# EAGLE board axiom_beta_plugin_module_eMMC_v0.1-Beta.9bbf1b58 (EAGLE 7.7.0)
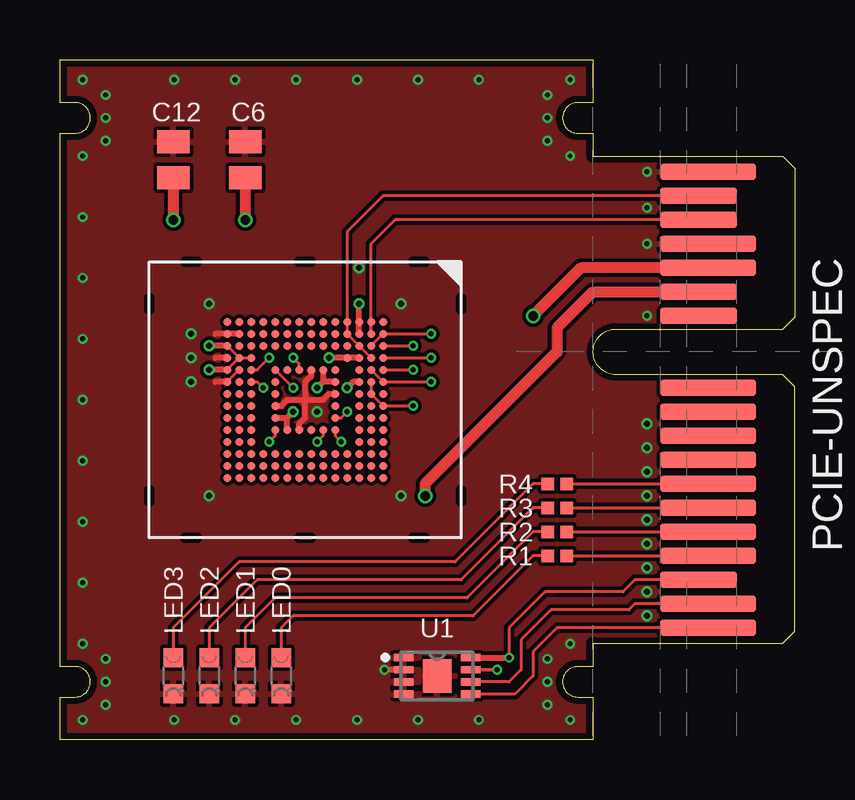
[diagram p0: board, top side]
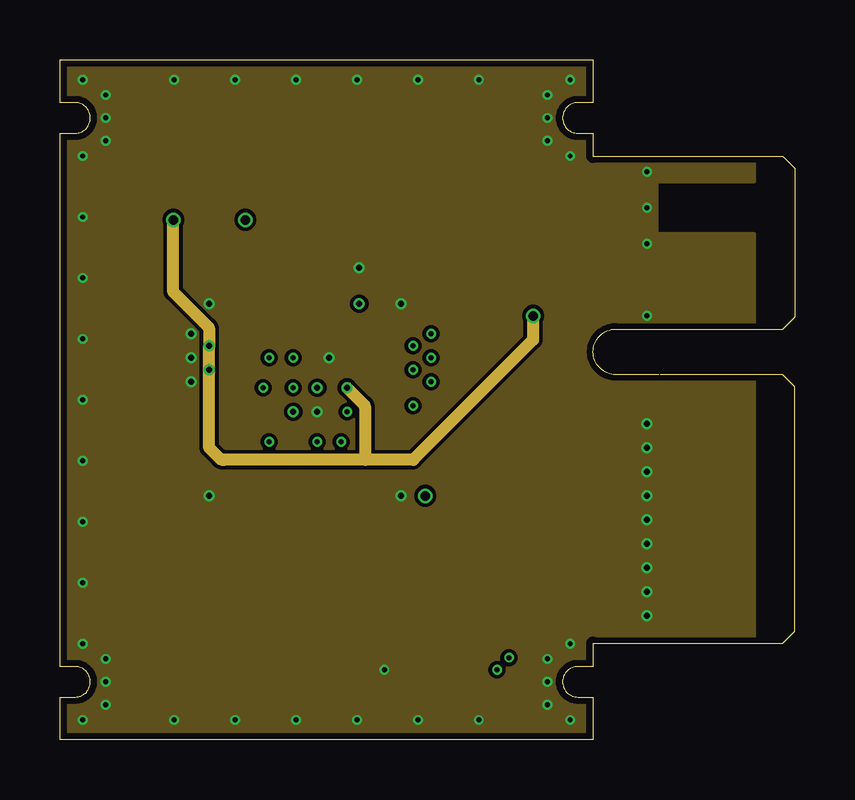
[diagram p1: board, inner layer Route2]
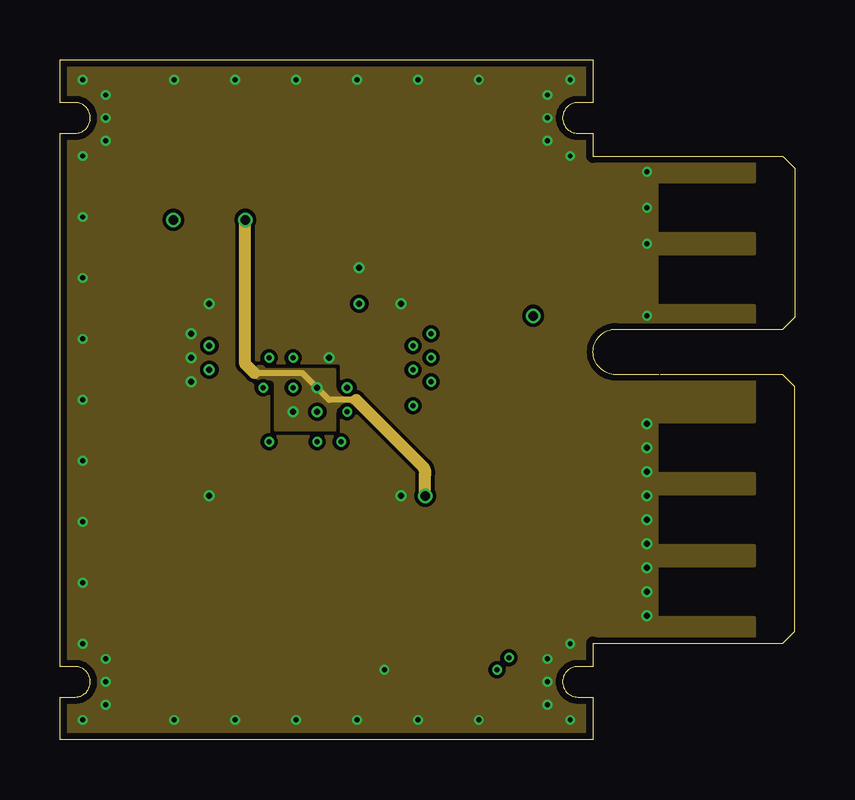
[diagram p2: board, inner layer Route15]
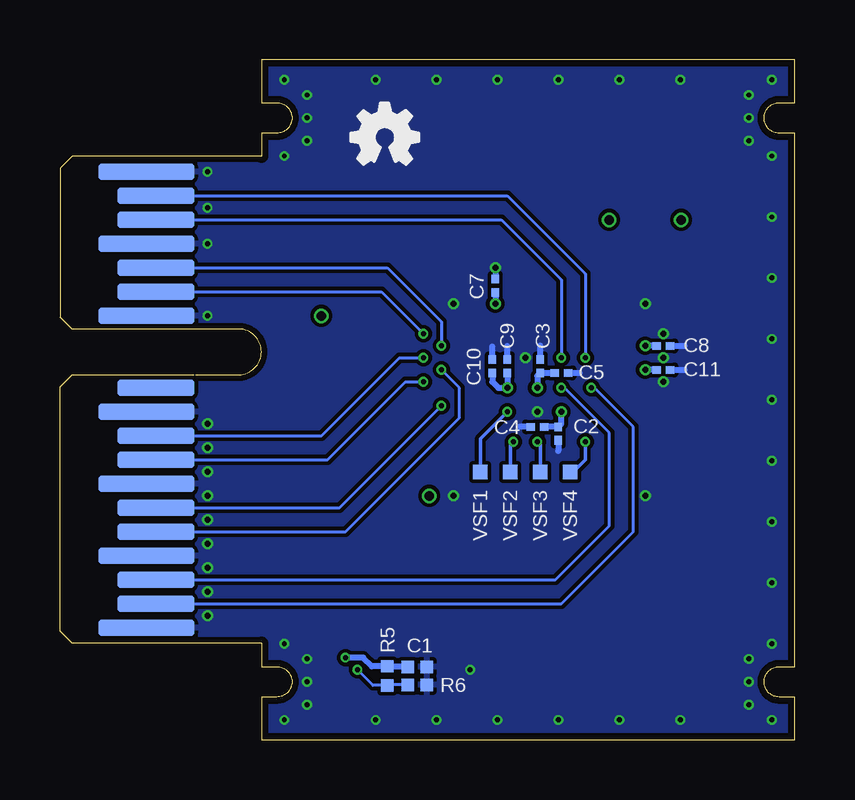
[diagram p3: board, bottom side, seen from below]

Size 30.62 x 28.32 mm. Coordinates in mm from the lower left corner, seen from the top.
Outline: 22.23,24.31 22.23,25.27 21.59,25.27 arc-90 20.96,25.91 arc-90 21.59,26.54 22.23,26.54 22.23,28.32 0,28.32 0,26.54 0.64,26.54 arc-90 1.27,25.91 arc-90 0.64,25.27 0,25.27 0,3.05 0.64,3.05 arc-90 1.27,2.41 arc-90 0.64,1.78 0,1.78 0,0 22.23,0 22.23,1.78 21.59,1.78 arc-90 20.96,2.41 arc-90 21.59,3.05 22.23,3.05 22.23,4.01
Copper layers (1*2*15*16): Top 0.035559375mm / dielectric 0.17018125mm / Route2 0.01778125mm / dielectric 47mil / Route15 0.01778125mm / dielectric 0.17018125mm / Bottom 0.035559375mm
Design rules "OSHPark-4layer-tuned *": minimum track width 5mil, minimum drill 8mil, track to track 6mil, track to pad 5mil, pad to pad 5mil, via to via 5mil, smd to smd 5mil, copper to edge 10mil, drill to drill 6mil, minimum pad ring 4mil, minimum via ring 4mil, stop-mask expansion 2mil, vias tented up to drill 20mil, thermal gap 6mil
Net classes: 0 default: width 0.127 mm, drill 0.203 mm; 1 power: width 0.254 mm, drill 0.203 mm
tKeepout: area -1,24.3 to 2.2,27.5; area -1,0.8 to 2.2,4; area 20,0.8 to 23.2,4; area 20,24.3 to 23.2,27.5
bKeepout: area -1,24.3 to 2.2,27.5; area -1,0.8 to 2.2,4; area 20,0.8 to 23.2,4; area 20,24.3 to 23.2,27.5
bRestrict: area 10.7,12.9 to 11.2,13.2; area 9.7,12.3 to 10,12.8; area 10.4,15.6 to 10.8,16.1; area 9.2,15.1 to 9.7,15.5; area 11.8,15.6 to 12.2,16.1; area 12.4,15.6 to 12.8,16.1; area 5,16.2 to 5.5,16.6; area 5,15.2 to 5.5,15.6; area 12.3,18.9 to 12.7,19.4

## Footprints (pad centres in the part's own frame; a part is rotated, then mirrored left to right if it is on the bottom)
0402-C = smd 0.52 x 0.52: 1 -0.4,0; 2 0.4,0
0201-C = smd 0.36 x 0.32: 1 -0.28,0; 2 0.28,0
0805-C = smd 0.95 x 1.35: 1 -0.75,0; 2 0.75,0
CHIPLED_0603 = smd 0.8 x 0.8: A 0,-0.75; C 0,0.75
PCIE-36-AXIOM = smd 0.7 x 4 bottom: A1 -11.5,3.6; A4 -8.5,3.6; A7 -5.5,3.6; A10 -2.5,3.6; A12 1.5,3.6; A15 4.5,3.6; A18 7.5,3.6 | smd 0.7 x 3.2 bottom: A2 -10.5,4; A3 -9.5,4; A5 -7.5,4; A6 -6.5,4; A8 -4.5,4; A9 -3.5,4; A11 -1.5,4; A13 2.5,4; A14 3.5,4; A16 5.5,4; A17 6.5,4 | smd 0.7 x 4: B1 -11.5,3.6; B2 -10.5,3.6; B4 -8.5,3.6; B5 -7.5,3.6; B6 -6.5,3.6; B7 -5.5,3.6; B8 -4.5,3.6; B9 -3.5,3.6; B10 -2.5,3.6; B11 -1.5,3.6; B14 3.5,3.6; B15 4.5,3.6; B18 7.5,3.6 | smd 0.7 x 3.2: B3 -9.5,4; B12 1.5,4; B13 2.5,4; B16 5.5,4; B17 6.5,4
DFN200X300X100-9N = smd 0.813 x 0.305: 1 -1.397,0.762; 2 -1.397,0.254; 3 -1.397,-0.254; 4 -1.397,-0.762; 5 1.397,-0.762; 6 1.397,-0.254; 7 1.397,0.254; 8 1.397,0.762 | smd 1.194 x 1.397: EP 0,0
FBGA153-SMD = smd 0.325 x 0.325: A1 -3.25,3.25; A2 -2.75,3.25; A3 -2.25,3.25; A4 -1.75,3.25; A5 -1.25,3.25; A6 -0.75,3.25; A7 -0.25,3.25; A8 0.25,3.25; A9 0.75,3.25; A10 1.25,3.25; A11 1.75,3.25; A12 2.25,3.25; A13 2.75,3.25; A14 3.25,3.25; B1 -3.25,2.75; B2 -2.75,2.75; B3 -2.25,2.75; B4 -1.75,2.75; B5 -1.25,2.75; B6 -0.75,2.75; B7 -0.25,2.75; B8 0.25,2.75; B9 0.75,2.75; B10 1.25,2.75; B11 1.75,2.75; B12 2.25,2.75; B13 2.75,2.75; B14 3.25,2.75; C1 -3.25,2.25; C2 -2.75,2.25; C3 -2.25,2.25; C4 -1.75,2.25; C5 -1.25,2.25; C6 -0.75,2.25; C7 -0.25,2.25; C8 0.25,2.25; C9 0.75,2.25; C10 1.25,2.25; C11 1.75,2.25; C12 2.25,2.25; C13 2.75,2.25; C14 3.25,2.25; D1 -3.25,1.75; D2 -2.75,1.75; D3 -2.25,1.75; D4 -1.75,1.75; D12 2.25,1.75; D13 2.75,1.75; D14 3.25,1.75; E1 -3.25,1.25; E2 -2.75,1.25; E3 -2.25,1.25; E5 -1.25,1.25; E6 -0.75,1.25; E7 -0.25,1.25; E8 0.25,1.25; E9 0.75,1.25; E10 1.25,1.25; E12 2.25,1.25; E13 2.75,1.25; E14 3.25,1.25; F1 -3.25,0.75; F2 -2.75,0.75; F3 -2.25,0.75; F5 -1.25,0.75; F10 1.25,0.75; F12 2.25,0.75; F13 2.75,0.75; F14 3.25,0.75; G1 -3.25,0.25; G2 -2.75,0.25; G3 -2.25,0.25; G5 -1.25,0.25; G10 1.25,0.25; G12 2.25,0.25; G13 2.75,0.25; G14 3.25,0.25; H1 -3.25,-0.25; H2 -2.75,-0.25; H3 -2.25,-0.25; H5 -1.25,-0.25; H10 1.25,-0.25; H12 2.25,-0.25; H13 2.75,-0.25; H14 3.25,-0.25; J1 -3.25,-0.75; J2 -2.75,-0.75; J3 -2.25,-0.75; J5 -1.25,-0.75; J10 1.25,-0.75; J12 2.25,-0.75; J13 2.75,-0.75; J14 3.25,-0.75; K1 -3.25,-1.25; K2 -2.75,-1.25; K3 -2.25,-1.25; K5 -1.25,-1.25; K6 -0.75,-1.25; K7 -0.25,-1.25; K8 0.25,-1.25; K9 0.75,-1.25; K10 1.25,-1.25; K12 2.25,-1.25; K13 2.75,-1.25; K14 3.25,-1.25; L1 -3.25,-1.75; L2 -2.75,-1.75; L3 -2.25,-1.75; L12 2.25,-1.75; L13 2.75,-1.75; L14 3.25,-1.75; M1 -3.25,-2.25; M2 -2.75,-2.25; M3 -2.25,-2.25; M4 -1.75,-2.25; M5 -1.25,-2.25; M6 -0.75,-2.25; M7 -0.25,-2.25; M8 0.25,-2.25; M9 0.75,-2.25; M10 1.25,-2.25; M11 1.75,-2.25; M12 2.25,-2.25; M13 2.75,-2.25; M14 3.25,-2.25; N1 -3.25,-2.75; N2 -2.75,-2.75; N3 -2.25,-2.75; N4 -1.75,-2.75; N5 -1.25,-2.75; N6 -0.75,-2.75; N7 -0.25,-2.75; N8 0.25,-2.75; N9 0.75,-2.75; N10 1.25,-2.75; N11 1.75,-2.75; N12 2.25,-2.75; N13 2.75,-2.75; N14 3.25,-2.75; P1 -3.25,-3.25; P2 -2.75,-3.25; P3 -2.25,-3.25; P4 -1.75,-3.25; P5 -1.25,-3.25; P6 -0.75,-3.25; P7 -0.25,-3.25; P8 0.25,-3.25; P9 0.75,-3.25; P10 1.25,-3.25; P11 1.75,-3.25; P12 2.25,-3.25; P13 2.75,-3.25; P14 3.25,-3.25
TP06SQ = smd 0.6 x 0.6: TP 0,0

## Placement (x,y rotation side)
C1  100n  [0402-C]  15.73,3.04 0 bottom
C2  100n  [0201-C]  9.85,12.76 270 bottom
C3  100n  [0201-C]  10.6,15.57 90 bottom
C4  2u2  [0201-C]  10.73,13.04 180 bottom
C5  2u2  [0201-C]  9.73,15.29 0 bottom
C6  22u  [0805-C]  7.73,24.16 90 top
C7  2u2  [0201-C]  12.48,18.91 90 bottom
C8  100n  [0201-C]  5.48,16.41 0 bottom
C9  100n  [0201-C]  11.98,15.57 90 bottom
C10  2u2  [0201-C]  12.6,15.57 90 bottom
C11  2u2  [0201-C]  5.48,15.41 0 bottom
C12  22u  [0805-C]  4.73,24.16 90 top
LED0  LED  [CHIPLED_0603]  9.23,2.66 180 top
LED1  LED  [CHIPLED_0603]  7.73,2.66 180 top
LED2  LED  [CHIPLED_0603]  6.23,2.66 180 top
LED3  LED  [CHIPLED_0603]  4.73,2.66 180 top
LOGO2  OSHW_LOGO_FILLX0100-NT  [OSHW_FILLX100_NOTEXT]  18.5,23.98 0 bottom
PCIE-UNSPEC  PCIE-36-AXIOM  [PCIE-36-AXIOM]  30.62,16.16 90 top  (not fitted)
R1  [0402-C]  20.73,7.66 180 top
R2  [0402-C]  20.73,8.66 180 top
R3  [0402-C]  20.73,9.66 180 top
R4  [0402-C]  20.73,10.66 180 top
R5  10k  [0402-C]  16.98,2.66 270 bottom
R6  1k  [0402-C]  15.73,2.29 0 bottom
U1  BR24G04NUX  [DFN200X300X100-9N]  15.73,2.66 0 top
U$1  EMMC-SMD  [FBGA153-SMD]  10.23,14.16 270 top
VSF1  TPTP06SQ  [TP06SQ]  13.1,11.16 90 bottom
VSF2  TPTP06SQ  [TP06SQ]  11.85,11.16 90 bottom
VSF3  TPTP06SQ  [TP06SQ]  10.6,11.16 90 bottom
VSF4  TPTP06SQ  [TP06SQ]  9.35,11.16 90 bottom

## Library data of the parts
C1-C12 R1-R6 = generic-rcl
LED0 LED1-LED3 = led
LOGO2 = ohw-logo
PCIE-UNSPEC = PCIe
U1 = eeprom
U$1 = emmc
VSF1-VSF4 = testpad

## Nets
3V3: C2.1 C3.1 C4.1 C5.1 C6.1 PCIE-UNSPEC.B13 U$1.E6 U$1.F5 U$1.J10 U$1.K9
!RST: PCIE-UNSPEC.A3 U$1.K5
CLK: PCIE-UNSPEC.A2 U$1.M6
CMD: PCIE-UNSPEC.A17 U$1.M5
D0: PCIE-UNSPEC.A14 U$1.A3
D1: PCIE-UNSPEC.A9 U$1.A4
D2: PCIE-UNSPEC.A5 U$1.A5
D3: PCIE-UNSPEC.B16 U$1.B2
D4: PCIE-UNSPEC.A13 U$1.B3
D5: PCIE-UNSPEC.B17 U$1.B4
D6: PCIE-UNSPEC.A8 U$1.B5
D7: PCIE-UNSPEC.A6 U$1.B6
DS: PCIE-UNSPEC.A16 U$1.H5
GND: C1.2 C2.2 C3.2 C4.2 C5.2 C6.2 C7.2 C8.2 C9.2 C10.2 C11.2 C12.2 LED0.C LED1.C LED2.C LED3.C PCIE-UNSPEC.A1 PCIE-UNSPEC.A4 PCIE-UNSPEC.A7 PCIE-UNSPEC.A10 PCIE-UNSPEC.A12 PCIE-UNSPEC.A15 PCIE-UNSPEC.A18 PCIE-UNSPEC.B15 PCIE-UNSPEC.B18 R6.2 U1.1 U1.2 U1.3 U1.4 U1.EP U$1.C4 U$1.E7 U$1.G5 U$1.H10 U$1.K8 U$1.N2 U$1.N5 U$1.P4 U$1.P6
I2C_V: C1.1 PCIE-UNSPEC.B3 R5.1 U1.8
LED0: PCIE-UNSPEC.B4 R1.1
LED1: PCIE-UNSPEC.B5 R2.1
LED2: PCIE-UNSPEC.B6 R3.1
LED3: PCIE-UNSPEC.B7 R4.1
N$1: LED0.A R1.2
N$2: LED1.A R2.2
N$3: LED2.A R3.2
N$4: LED3.A R4.2
N$12: R5.2 R6.1 U1.7
N$14: U$1.E9 VSF1.TP
N$15: U$1.E10 VSF2.TP
N$16: U$1.F10 VSF3.TP
N$17: U$1.K10 VSF4.TP
N$209: PCIE-UNSPEC.A11
PCIE_5V: PCIE-UNSPEC.B12
SCL: PCIE-UNSPEC.B2 U1.6
SDA: PCIE-UNSPEC.B1 U1.5
VCCIO: C8.1 C9.1 C10.1 C11.1 C12.1 PCIE-UNSPEC.B14 U$1.C6 U$1.M4 U$1.N4 U$1.P3 U$1.P5
VDDI: C7.1 U$1.C2

## Tracks (layer width: path | path; a pad name or v marks a point on that pad's centre or on a via)
3V3  (via drill 0.25, 0.4)
  Top 0.254: U$1.K9 9.48,13.41 | U$1.J10 9.48,13.41 | 9.48,13.41 v9.73,13.66 | U$1.F5 10.98,14.91 | U$1.E6 10.98,14.91 | 10.98,14.91 v10.73,14.66
  Top 0.457: PCIE-UNSPEC.B13 22.23,18.66 20.73,17.16 20.73,16.16 15.23,10.66 v15.23,10.16 | C6.1 v7.73,21.66
  Route15 0.254: 8.1,15.29 10.1,15.29 v10.73,14.66 11.23,14.16 12.35,14.16
  Route15 0.5: v15.23,10.16 15.23,11.06 arc45 15.15,11.36 12.35,14.16 | 8.1,15.29 7.73,15.66 v7.73,21.66
  Bottom 0.254: C5.1 C3.1 10.73,15.16 v10.73,14.66 | C4.1 C2.1 9.73,13.16 v9.73,13.66
  pour Route15: 12.23,14.41 11.73,14.41 arc-90 11.48,14.66 11.48,15.41 8.6,15.41 8.48,15.54 8.23,15.54 8.23,15.04 8.73,15.04 arc-90 8.98,14.79 8.98,12.91 11.48,12.91 11.48,13.66 arc-90 11.73,13.91 12.23,13.91
!RST  (via drill 0.2)
  Top 0.127: U$1.K5 v9.73,14.66
  Bottom 0.127: PCIE-UNSPEC.A3 9.98,6.66 7.73,8.91 7.73,12.79 9.6,14.66 v9.73,14.66
CLK  (via drill 0.2)
  Top 0.127: U$1.M6 8.23,14.91 v8.48,14.66
  Bottom 0.127: PCIE-UNSPEC.A2 9.73,5.66 6.73,8.66 6.73,13.04 8.35,14.66 v8.48,14.66
CMD  (via drill 0.2)
  Top 0.127: U$1.M5 8.23,15.41 v8.73,15.91
  Bottom 0.127: PCIE-UNSPEC.A17 11.98,22.66 8.73,19.41 v8.73,15.91
D0  (via drill 0.2)
  Top 0.127: U$1.A3 v14.73,16.41
  Bottom 0.127: PCIE-UNSPEC.A14 16.98,19.66 14.73,17.41 v14.73,16.41
D1  (via drill 0.2)
  Top 0.127: U$1.A4 v15.48,15.91
  Bottom 0.127: PCIE-UNSPEC.A9 19.73,12.66 16.48,15.91 v15.48,15.91
D2  (via drill 0.2)
  Top 0.127: U$1.A5 v14.73,15.41
  Bottom 0.127: PCIE-UNSPEC.A5 18.73,8.66 13.98,13.41 13.98,14.66 v14.73,15.41
D3
  Top 0.127: U$1.B2 12.98,20.66 13.98,21.66 PCIE-UNSPEC.B16
D4  (via drill 0.2)
  Top 0.127: U$1.B3 13.48,16.91 v15.48,16.91
  Bottom 0.127: PCIE-UNSPEC.A13 17.23,18.66 v15.48,16.91
D5
  Top 0.127: U$1.B4 11.98,16.91 11.98,21.16 13.48,22.66 PCIE-UNSPEC.B17
D6  (via drill 0.2)
  Top 0.127: U$1.B5 13.48,14.91 v15.48,14.91
  Bottom 0.127: PCIE-UNSPEC.A8 19.48,11.66 16.23,14.91 v15.48,14.91
D7  (via drill 0.2)
  Top 0.127: U$1.B6 12.98,14.41 13.48,13.91 v14.73,13.91
  Bottom 0.127: PCIE-UNSPEC.A6 18.98,9.66 v14.73,13.91
DS  (via drill 0.2)
  Top 0.127: U$1.H5 9.98,15.66 v9.73,15.91
  Bottom 0.127: PCIE-UNSPEC.A16 12.23,21.66 9.73,19.16 v9.73,15.91
GND  (via drill 0.2, 0.25)
  Top 0.127: U$1.N5 U$1.P6
  Top 0.254: 10.23,14.16 9.48,14.16 9.23,13.91 U$1.K8 | U$1.G5 10.48,15.16 10.23,14.91 10.23,14.16 | 10.23,14.16 10.98,14.16 11.23,14.41 U$1.E7 | U$1.H10 9.98,13.16 10.23,13.41 10.23,14.16 | U$1.N2 6.48,16.91 | U$1.C4 v11.23,15.91 | U$1.P4 6.48,15.91 | U$1.P6 6.48,14.91 | U1.2 v13.53,2.91
  Bottom 0.254: v12.48,19.66 C7.2 12.48,19.16 | C2.2 9.85,12.04 | C4.2 11.5,13.04 | C3.2 10.6,16.44 | C9.2 11.98,16.41 | C10.2 12.6,16.39 | C5.2 8.95,15.29 | C8.2 4.58,16.41 | C11.2 4.58,15.41
  other vias: 0.95,27.5 21.27,27.5 21.27,0.83 0.95,0.83 4.76,27.5 17.46,27.5 4.76,0.83 0.95,4 0.95,24.32 1.91,24.96 21.27,24.32 17.46,0.83 21.27,4 7.3,27.5 9.84,27.5 12.38,27.5 1.91,26.86 20.32,24.96 20.32,26.86 1.91,1.46 1.91,3.37 20.32,3.37 20.32,1.46 9.84,0.83 12.38,0.83 7.3,0.83 14.92,0.83 20.32,25.91 1.91,25.91 1.91,2.41 20.32,2.41 24.48,23.66 24.48,20.66 14.92,27.5 0.95,14.16 0.95,16.7 0.95,19.24 0.95,21.78 0.95,11.62 0.95,9.08 0.95,6.54 10.73,13.66 5.48,15.91 5.48,16.91 5.48,14.91 24.48,13.16 24.48,12.16 24.48,11.16 24.48,10.16 24.48,9.16 24.48,8.16 24.48,7.16 24.48,6.16 24.48,5.16 24.48,22.16 24.48,17.66 6.23,18.16 14.23,18.16 6.23,10.16 14.23,10.16
  pour Bottom (isolate 0.127): 0,28.45 22.23,28.45 22.23,24.32 25.4,24.32 25.4,3.75 22.23,3.75 22.23,-0.13 0,-0.13
  pour Top (isolate 0.127): 0,28.45 22.23,28.45 22.23,24.32 25.4,24.32 25.4,3.75 22.23,3.75 22.23,-0.13 0,-0.13
  pour Route2 (isolate 0.127, rank 3): 0,28.45 22.23,28.45 22.23,24.57 28.96,24.57 28.96,23.24 24.89,23.24 24.89,21.08 28.96,21.08 28.96,3.75 22.23,3.75 22.23,-0.13 0,-0.13
  pour Route15 (isolate 0.127, rank 3): 0,28.45 22.23,28.45 22.23,24.57 28.96,24.57 28.96,23.24 24.89,23.24 24.89,21.08 28.96,21.08 28.96,20.24 24.89,20.24 24.89,18.08 28.96,18.08 28.96,13.24 24.89,13.24 24.89,11.08 28.96,11.08 28.96,10.24 24.89,10.24 24.89,8.08 28.96,8.08 28.96,7.24 24.89,7.24 24.89,5.08 28.96,5.08 28.96,3.75 22.23,3.75 22.23,-0.13 0,-0.13
I2C_V  (via drill 0.2)
  Top 0.127: PCIE-UNSPEC.B3 23.98,6.66 23.48,6.16 20.23,6.16 18.73,4.66 v18.73,3.42
  Top 0.254: U1.8 v18.73,3.42
  Bottom 0.254: C1.1 16.95,3.04 R5.1 17.62,3.06 17.99,3.42 v18.73,3.42
LED0
  Top 0.127: R1.1 PCIE-UNSPEC.B4
LED1
  Top 0.127: R2.1 PCIE-UNSPEC.B5
LED2
  Top 0.127: R3.1 PCIE-UNSPEC.B6
LED3
  Top 0.127: R4.1 PCIE-UNSPEC.B7
N$1
  Top 0.127: R1.2 19.73,7.66 17.23,5.16 9.73,5.16 9.23,4.66 LED0.A
N$2
  Top 0.127: R2.2 19.73,8.66 16.98,5.91 8.98,5.91 7.73,4.66 LED1.A
N$3
  Top 0.127: R3.2 19.73,9.66 16.73,6.66 8.23,6.66 6.23,4.66 LED2.A
N$4
  Top 0.127: R4.2 19.73,10.66 16.48,7.41 7.48,7.41 4.73,4.66 LED3.A
N$12  (via drill 0.2)
  Top 0.152: U1.7 v18.23,2.91
  Bottom 0.127: R6.1 16.95,2.29 R5.2 17.58,2.26 v18.23,2.91
N$14  (via drill 0.2)
  Top 0.127: U$1.E9 11.73,13.41 v11.98,13.66
  Bottom 0.152: VSF1.TP 13.1,12.54 v11.98,13.66
N$15  (via drill 0.2)
  Top 0.127: U$1.E10 11.48,12.66 v11.73,12.41
  Bottom 0.152: v11.73,12.41 11.85,12.29 VSF2.TP
N$16  (via drill 0.2)
  Top 0.127: U$1.F10 10.98,12.66 v10.73,12.41
  Bottom 0.152: VSF3.TP 10.6,12.29 v10.73,12.41
N$17  (via drill 0.2)
  Top 0.127: U$1.K10 8.98,12.66 v8.73,12.41
  Bottom 0.152: v8.73,12.41 8.73,11.66 9.23,11.16 VSF4.TP
N$18
  Top 0.127: 5.23,19.91 5.73,19.91
N$19
  Top 0.127: 3.73,17.91 3.73,18.41
N$20
  Top 0.127: 3.73,9.91 3.73,10.41
N$21
  Top 0.127: 5.73,8.41 5.23,8.41
N$22
  Top 0.127: 15.23,8.41 14.73,8.41
N$23
  Top 0.127: 16.73,10.41 16.73,9.91
N$24
  Top 0.127: 16.73,18.41 16.73,17.91
N$25
  Top 0.127: 14.73,19.91 15.23,19.91
N$26
  Top 0.127: 9.98,19.91 10.48,19.91
N$27
  Top 0.127: 9.98,8.41 10.48,8.41
N$30
  cutout Top: 6.98,17.41 13.48,17.41 13.48,10.91 6.98,10.91 6.98,14.16 8.98,14.16 8.98,12.91 11.48,12.91 11.48,15.41 8.98,15.41 8.98,14.16 6.98,14.16
SCL
  Top 0.127: U1.6 18.72,2.41 19.23,2.91 19.23,4.16 20.48,5.41 23.73,5.41 23.98,5.66 PCIE-UNSPEC.B2
SDA
  Top 0.127: U1.5 18.96,1.9 19.73,2.66 19.73,3.66 20.73,4.66 PCIE-UNSPEC.B1
  Top 0.152: 17.24,1.99 U1.5 17.24,1.99
VCCIO  (via drill 0.25, 0.4)
  Top 0.127: U$1.N4 U$1.P5 | U$1.N4 U$1.M4 | U$1.N4 U$1.P3
  Top 0.254: U$1.P3 v6.23,16.41 | U$1.P5 v6.23,15.41 | U$1.C6 12.23,14.91 v11.98,14.66
  Top 0.457: PCIE-UNSPEC.B14 21.73,19.66 v19.73,17.66 | C12.1 v4.73,21.66
  Route2 0.5: v19.73,17.66 19.73,16.66 14.73,11.66 12.73,11.66 | 12.73,11.66 6.83,11.66 arc-45 6.65,11.73 6.23,12.16 v6.23,16.41 6.23,17.06 arc45 6.15,17.23 4.73,18.66 v4.73,21.66 | v11.98,14.66 12.65,13.98 arc-45 12.73,13.81 12.73,11.66
  Bottom 0.254: C8.1 v6.23,16.41 | C11.1 v6.23,15.41 | C9.1 v11.98,14.66 12.35,14.66 12.6,14.91 C10.1
VDDI  (via drill 0.25)
  Top 0.254: U$1.C2 v12.48,18.16
  Bottom 0.254: C7.1 v12.48,18.16

## Text on the board
Measures: X1 | U1
tDocu: HIGH SPEED IO
_tSilk: eMMC Module | V0.1 / R1.0
_bSilk: (C) 2017 H.Pötzl / Licensed under / CERN OHL v.1.2
tEngrave: AXIOM BETA SPM 1xeMMC / TOP SIDE V0.1 R1.0
bEngrave: AXIOM BETA SPM 1xeMMC / BOTTOM SIDE V0.1 R1.0